# EAGLE board CAA-NMC-OSH_panelized (EAGLE 9.2.2)
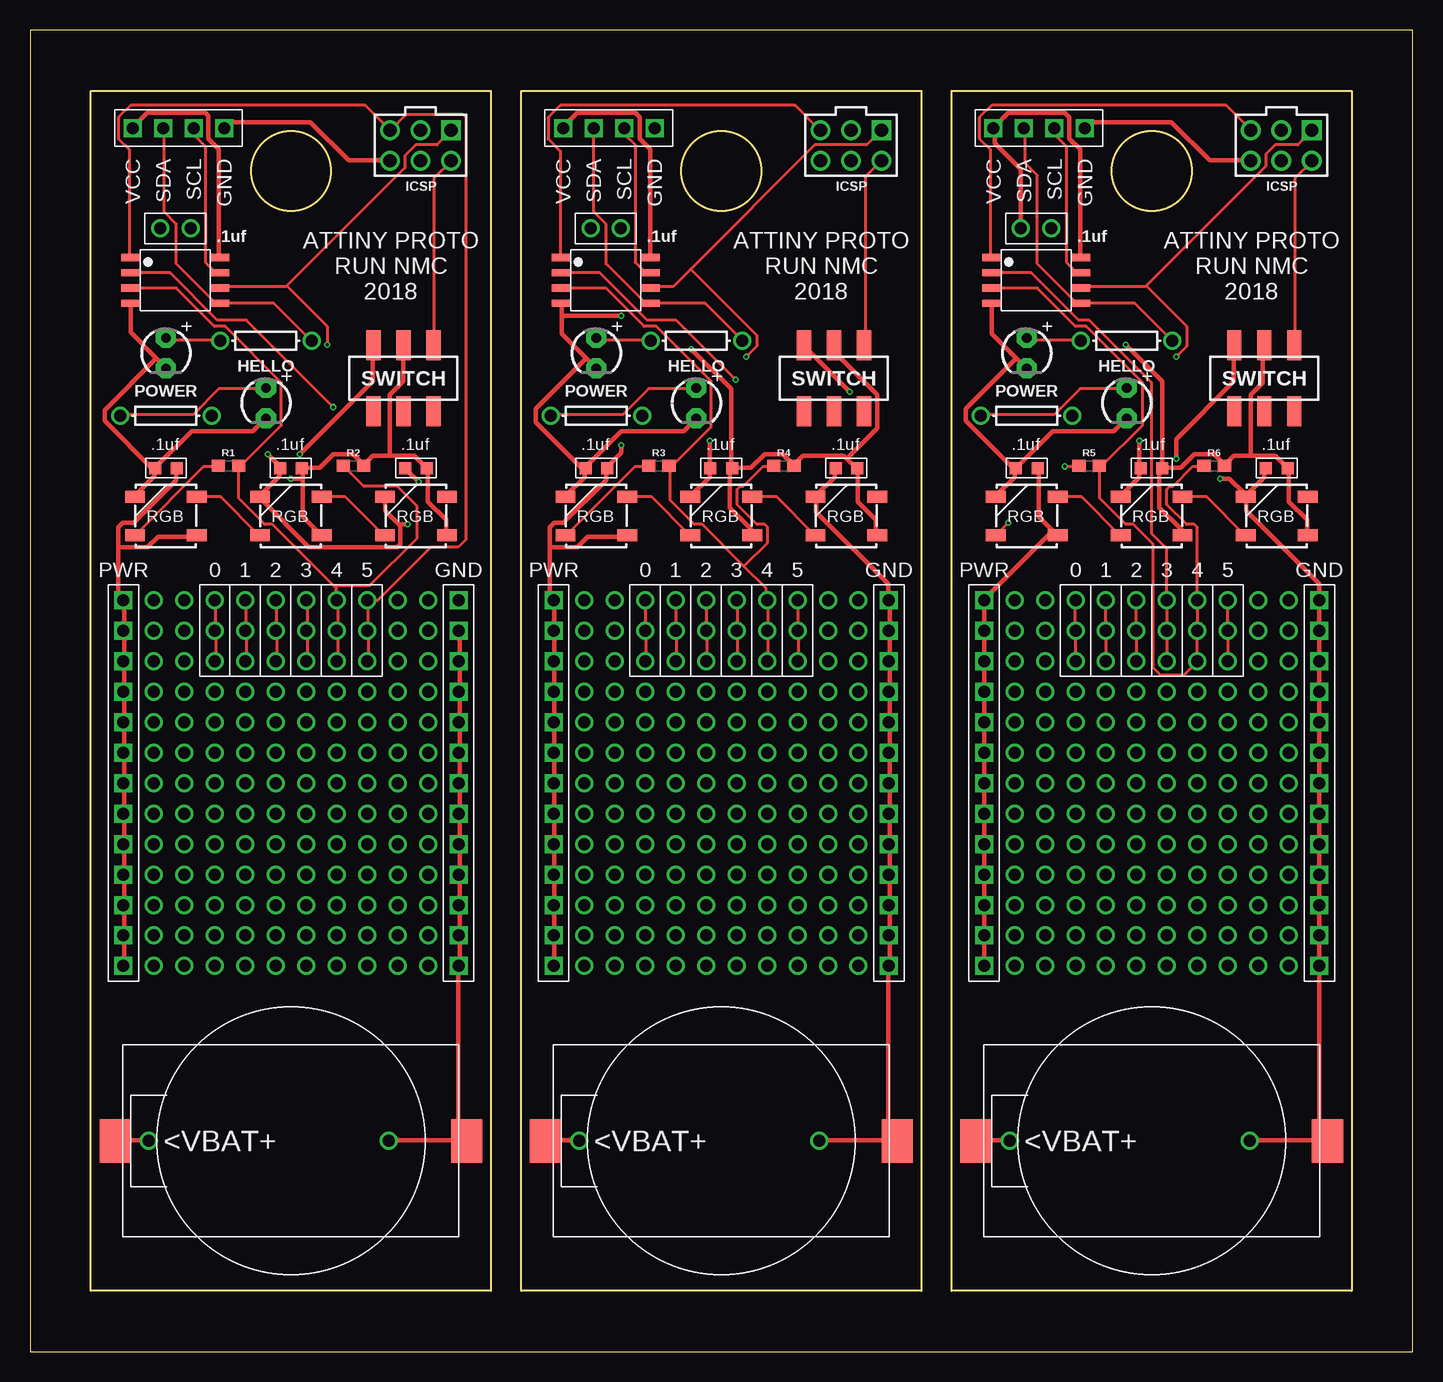
[diagram p0: board, top side]
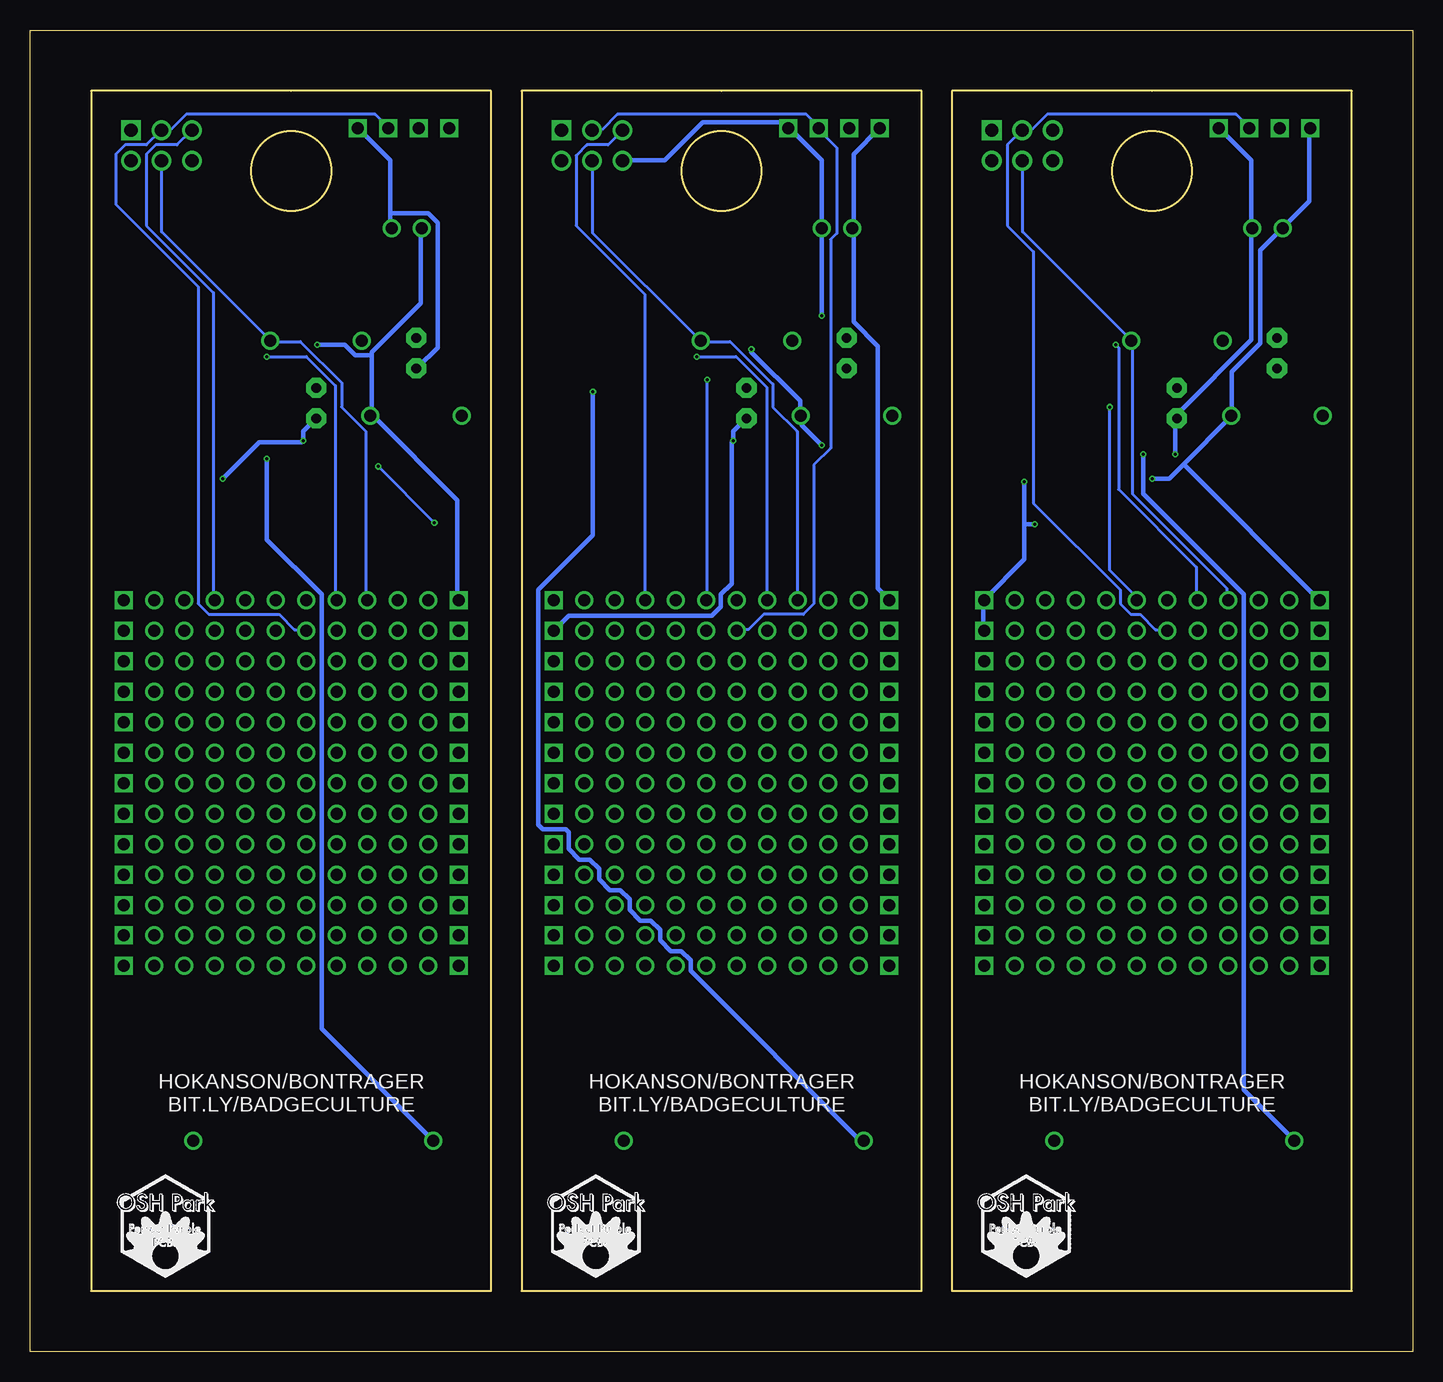
[diagram p1: board, bottom side, seen from below]

Size 115.24 x 110.16 mm. Coordinates in mm from the lower left corner, seen from the top.
Outline: 5.08,105.08 5.08,5.08 38.41,5.08 38.41,105.08 5.08,105.08
Outline: 5.08,105.08 21.75,105.08
Outline: 40.95,105.08 40.95,5.08 74.28,5.08 74.28,105.08 40.95,105.08
Outline: 40.95,105.08 57.61,105.08
Outline: 76.81,105.08 76.81,5.08 110.14,5.08 110.14,105.08 76.81,105.08
Outline: 76.81,105.08 93.48,105.08
Outline: 0,0 115.24,0 115.24,110.16 0,110.16 0,0
Outline: circle at 21.75,98.4 radius 3.33
Outline: circle at 57.61,98.4 radius 3.33
Outline: circle at 93.47,98.4 radius 3.33
Copper layers (1*16): Top 0.035559375mm / dielectric 1.6mm / Bottom 0.035559375mm
Design rules "oshpark-2layer": minimum track width 6mil, minimum drill 10mil, track to track 6mil, track to pad 6mil, pad to pad 6mil, via to via 6mil, smd to smd 6mil, copper to edge 15mil, drill to drill 6mil, minimum pad ring 5mil, minimum via ring 5mil, stop-mask expansion 2.5mil, vias tented up to drill 0mil, thermal gap 10mil
Net classes: 0 default: width 0.254 mm, clearance 0.254 mm; 1 VCC: width 0.381 mm, clearance 0.254 mm; 2 GND: width 0.381 mm, clearance 0.254 mm; 3 VBAT: width 0.381 mm, clearance 0.254 mm

## Footprints (pad centres in the part's own frame; a part is rotated, then mirrored left to right if it is on the bottom)
WS2812B = smd 1 x 1: CAP1 -0.9,4; CAP2 0.9,4 | smd 1.651 x 1: DI -2.577,-1.6; DO 2.577,1.6; GND -2.577,1.6; VCC 2.577,-1.6
LED3MM = drill 0.813 pad 1.676 octagon: NEG 1.27,0; POS -1.27,0
SOT127P798X216-8N = smd 1.5 x 0.6: GND -3.75,-1.905; PB0 3.75,-1.905; PB1 3.75,-0.635; PB2 3.75,0.635; PB3 -3.75,0.635; PB4 -3.75,-0.635; PB5 -3.75,1.905; VCC 3.75,1.905
HDRV6W64P254_2X3_762X508X868P = drill 1.1 pad 1.65: 0/MOSI/SDA 0,1.27; 2/SCK/SCL 0,3.81; 5/RST -2.54,3.81; GND -2.54,1.27; VCC 2.54,1.27 | drill 1.1 pad 1.65 square: 1/MISO 2.54,3.81
0603 = smd 1.1 x 1: 1 -0.85,0; 2 0.85,0
PROTO = drill 1: 0A -6.35,30.48; 0B -6.35,27.94; 0C -6.35,25.4; 1A -3.81,30.48; 1B -3.81,27.94; 1C -3.81,25.4; 2A -1.27,30.48; 2B -1.27,27.94; 2C -1.27,25.4; 3A 1.27,30.48; 3B 1.27,27.94; 3C 1.27,25.4; 4A 3.81,30.48; 4B 3.81,27.94; 4C 3.81,25.4; 5A 6.35,30.48; 5B 6.35,27.94; 5C 6.35,25.4; VSTRIP1 -8.89,22.86; VSTRIP2 -8.89,20.32; VSTRIP3 -8.89,17.78; VSTRIP4 -8.89,15.24; VSTRIP5 -8.89,12.7; VSTRIP6 -6.35,22.86; VSTRIP7 -6.35,20.32; VSTRIP8 -6.35,17.78; VSTRIP9 -6.35,15.24; VSTRIP10 -6.35,12.7; VSTRIP11 -11.43,10.16; VSTRIP12 -11.43,7.62; VSTRIP13 -11.43,5.08; VSTRIP14 -11.43,2.54; VSTRIP15 -11.43,0; VSTRIP16 -3.81,22.86; VSTRIP17 -3.81,20.32; VSTRIP18 -3.81,17.78; VSTRIP19 -3.81,15.24; VSTRIP20 -3.81,12.7; VSTRIP21 -1.27,22.86; VSTRIP22 -1.27,20.32; VSTRIP23 -1.27,17.78; VSTRIP24 -1.27,15.24; VSTRIP25 -1.27,12.7; VSTRIP26 1.27,22.86; VSTRIP27 1.27,20.32; VSTRIP28 1.27,17.78; VSTRIP29 1.27,15.24; VSTRIP30 1.27,12.7; VSTRIP31 3.81,22.86; VSTRIP32 3.81,20.32; VSTRIP33 3.81,17.78; VSTRIP34 3.81,15.24; VSTRIP35 3.81,12.7; VSTRIP36 6.35,22.86; VSTRIP37 6.35,20.32; VSTRIP38 6.35,17.78; VSTRIP39 6.35,15.24; VSTRIP40 6.35,12.7; VSTRIP41 8.89,22.86; VSTRIP42 8.89,20.32; VSTRIP43 8.89,17.78; VSTRIP44 8.89,15.24; VSTRIP45 8.89,12.7; VSTRIP46 11.43,22.86; VSTRIP47 11.43,20.32; VSTRIP48 11.43,17.78; VSTRIP49 11.43,15.24; VSTRIP50 11.43,12.7; VSTRIP51 -11.43,22.86; VSTRIP52 -11.43,20.32; VSTRIP53 -11.43,17.78; VSTRIP54 -11.43,15.24; VSTRIP55 -8.89,10.16; VSTRIP56 -8.89,7.62; VSTRIP57 -8.89,5.08; VSTRIP58 -8.89,2.54; VSTRIP59 -8.89,0; VSTRIP60 -11.43,12.7; VSTRIP61 -8.89,30.48; VSTRIP62 -8.89,27.94; VSTRIP63 -8.89,25.4; VSTRIP64 -11.43,30.48; VSTRIP65 -11.43,27.94; VSTRIP66 -11.43,25.4; VSTRIP67 8.89,30.48; VSTRIP68 8.89,27.94; VSTRIP69 8.89,25.4; VSTRIP70 11.43,30.48; VSTRIP71 11.43,27.94; VSTRIP72 11.43,25.4; VSTRIP75 -6.35,10.16; VSTRIP76 -6.35,7.62; VSTRIP77 -6.35,5.08; VSTRIP78 -6.35,2.54; VSTRIP79 -6.35,0; VSTRIP95 -3.81,10.16; VSTRIP96 -3.81,7.62; VSTRIP97 -3.81,5.08; VSTRIP98 -3.81,2.54; VSTRIP99 -3.81,0; VSTRIP115 -1.27,10.16; VSTRIP116 -1.27,7.62; VSTRIP117 -1.27,5.08; VSTRIP118 -1.27,2.54; VSTRIP119 -1.27,0; VSTRIP135 1.27,10.16; VSTRIP136 1.27,7.62; VSTRIP137 1.27,5.08; VSTRIP138 1.27,2.54; VSTRIP139 1.27,0; VSTRIP155 3.81,10.16; VSTRIP156 3.81,7.62; VSTRIP157 3.81,5.08; VSTRIP158 3.81,2.54; VSTRIP159 3.81,0; VSTRIP175 6.35,10.16; VSTRIP176 6.35,7.62; VSTRIP177 6.35,5.08; VSTRIP178 6.35,2.54; VSTRIP179 6.35,0; VSTRIP195 8.89,10.16; VSTRIP196 8.89,7.62; VSTRIP197 8.89,5.08; VSTRIP198 8.89,2.54; VSTRIP199 8.89,0; VSTRIP215 11.43,10.16; VSTRIP216 11.43,7.62; VSTRIP217 11.43,5.08; VSTRIP218 11.43,2.54; VSTRIP219 11.43,0 | drill 1 square: GND0 13.97,0; GND1 13.97,2.54; GND2 13.97,5.08; GND3 13.97,7.62; GND4 13.97,10.16; GND5 13.97,12.7; GND6 13.97,15.24; GND7 13.97,17.78; GND8 13.97,20.32; GND9 13.97,22.86; GND10 13.97,25.4; GND11 13.97,27.94; GND12 13.97,30.48; PWR0 -13.97,0; PWR1 -13.97,2.54; PWR2 -13.97,5.08; PWR3 -13.97,7.62; PWR4 -13.97,10.16; PWR5 -13.97,12.7; PWR6 -13.97,15.24; PWR7 -13.97,17.78; PWR8 -13.97,20.32; PWR9 -13.97,22.86; PWR10 -13.97,25.4; PWR11 -13.97,27.94; PWR12 -13.97,30.48
SMT-CR-HOLDER = smd 2.6 x 3.65: GND 14.65,0; VBAT -14.65,0
THRU-CR-HOLDER = drill 1: GND 8.15,0; VBAT -11.85,0
I2C-PADS = drill 1 square: GND 0,3.81; SCL 0,1.27; SDA 0,-1.27; VCC 0,-3.81
DECOUPLING_CAP = drill 1: P$1 0,0; P$2 2.54,0
AXIAL-0.3 = drill 1: P$3 -3.81,0; P$4 3.81,0
SMT-SWITCH = smd 1.2 x 2.5: 1 -2.5,-2.75; 2 0,-2.75; 3 2.5,-2.75; 4 -2.5,2.75; 5 0,2.75; 6 2.5,2.75

## Placement (x,y rotation side)
D1  WS2812B  [WS2812B]  11.33,69.65 0 top
D2  WS2812B  [WS2812B]  21.74,69.65 0 top
D3  WS2812B  [WS2812B]  32.17,69.65 0 top
D4  WS2812B  [WS2812B]  47.2,69.65 0 top
D5  WS2812B  [WS2812B]  57.61,69.65 0 top
D6  WS2812B  [WS2812B]  68.03,69.65 0 top
D7  WS2812B  [WS2812B]  83.06,69.65 0 top
D8  WS2812B  [WS2812B]  93.47,69.65 0 top
D9  WS2812B  [WS2812B]  103.9,69.65 0 top
HELLO  LED3MM  [LED3MM]  11.33,83.23 270 top
HELLO1  LED3MM  [LED3MM]  47.19,83.23 270 top
HELLO2  LED3MM  [LED3MM]  83.06,83.23 270 top
IC1  ATTINY85-20SU  [SOT127P798X216-8N]  12.11,89.3 0 top
IC2  ATTINY85-20SU  [SOT127P798X216-8N]  47.98,89.3 0 top
IC3  ATTINY85-20SU  [SOT127P798X216-8N]  83.84,89.3 0 top
J1  M20-9980346  [HDRV6W64P254_2X3_762X508X868P]  32.55,98.01 0 top
J2  M20-9980346  [HDRV6W64P254_2X3_762X508X868P]  68.41,98.01 0 top
J3  M20-9980346  [HDRV6W64P254_2X3_762X508X868P]  104.28,98.01 0 top
POWER  LED3MM  [LED3MM]  19.66,79.06 270 top
POWER1  LED3MM  [LED3MM]  55.53,79.06 270 top
POWER2  LED3MM  [LED3MM]  91.39,79.06 270 top
R1  470  [0603]  16.54,73.85 0 top
R2  10k  [0603]  26.96,73.85 0 top
R3  470  [0603]  52.4,73.85 0 top
R4  10k  [0603]  62.82,73.85 0 top
R5  470  [0603]  88.27,73.85 0 top
R6  10k  [0603]  98.69,73.85 0 top
U$1  PROTO  [PROTO]  21.75,32.16 0 top
U$2  SMT-BATTERY-HOLDER  [SMT-CR-HOLDER]  21.75,17.58 0 top
U$3  THRU-CR-HOLDER  [THRU-CR-HOLDER]  21.75,17.58 0 top
U$4  I2C-PADS  [I2C-PADS]  12.37,101.99 270 top
U$5  [OSHPARK_LOGOHEX]  36.33,6.12 0 bottom
U$6  DECOUPLING_CAP  [DECOUPLING_CAP]  49.25,93.64 180 top
U$7  RESISTOR  [AXIAL-0.3]  47.19,78.02 0 top
U$8  RESISTOR  [AXIAL-0.3]  55.53,84.27 0 top
U$9  SMT-SWITCH  [SMT-SWITCH]  66.99,81.15 0 top
U$10  PROTO  [PROTO]  57.61,32.16 0 top
U$11  SMT-BATTERY-HOLDER  [SMT-CR-HOLDER]  57.61,17.58 0 top
U$12  THRU-CR-HOLDER  [THRU-CR-HOLDER]  57.61,17.58 0 top
U$13  I2C-PADS  [I2C-PADS]  48.23,101.99 270 top
U$14  [OSHPARK_LOGOHEX]  72.2,6.12 0 bottom
U$15  DECOUPLING_CAP  [DECOUPLING_CAP]  85.11,93.64 180 top
U$16  RESISTOR  [AXIAL-0.3]  83.06,78.02 0 top
U$17  RESISTOR  [AXIAL-0.3]  91.39,84.27 0 top
U$18  SMT-SWITCH  [SMT-SWITCH]  102.85,81.15 0 top
U$19  PROTO  [PROTO]  93.48,32.16 0 top
U$20  SMT-BATTERY-HOLDER  [SMT-CR-HOLDER]  93.48,17.58 0 top
U$21  THRU-CR-HOLDER  [THRU-CR-HOLDER]  93.48,17.58 0 top
U$22  I2C-PADS  [I2C-PADS]  84.1,101.99 270 top
U$23  [OSHPARK_LOGOHEX]  108.06,6.12 0 bottom
U$123  DECOUPLING_CAP  [DECOUPLING_CAP]  13.38,93.64 180 top
U$126  RESISTOR  [AXIAL-0.3]  11.33,78.02 0 top
U$127  RESISTOR  [AXIAL-0.3]  19.66,84.27 0 top
U$145  SMT-SWITCH  [SMT-SWITCH]  31.12,81.15 0 top

## Library data of the parts
D1-D9 = BadgeParts; PROD_ID: DIO-12503
HELLO HELLO1 HELLO2 POWER POWER1 POWER2 U$1-U$4 U$6-U$13 U$15-U$22 U$123 U$126 U$127 U$145 = BadgeParts
IC1-IC3 = BadgeParts; ARROW_PART_NUMBER: ATTINY85-20SU; ARROW_PRICE/STOCK: https://www.arrow.com/en/products/attiny85-20su/microchip-technology; DESCRIPTION: MICROCHIP - ATTINY85-20SU - MICROCONTROLLER MCU, 8 BIT, ATTINY, 20MHZ, SOIC-8; HEIGHT: 2.16mm; MANUFACTURER_NAME: Microchip; MANUFACTURER_PART_NUMBER: ATTINY85-20SU; RS_PART_NUMBER: 1331674; RS_PRICE/STOCK: http://uk.rs-online.com/web/p/products/1331674
J1-J3 = BadgeParts; ARROW_PART_NUMBER: M20-9980346; ARROW_PRICE/STOCK: http://uk.rs-online.com/web/p/products/7457046P; DESCRIPTION: 03+03 DIL Vertical Pin Header HARWIN M20 Series, 2.54mm Pitch 6 Way 2 Row Straight PCB Header, Solder Termination, 3A; HEIGHT: 8.68mm; MANUFACTURER_NAME: HARWIN; MANUFACTURER_PART_NUMBER: M20-9980346; RS_PART_NUMBER: 7457046P; RS_PRICE/STOCK: http://uk.rs-online.com/web/p/products/7457046P
R1 R3 R5 = SparkFun-Resistors; PROD_ID: RES-07869
R2 R4 R6 = SparkFun-Resistors; PROD_ID: RES-00824
U$5 U$14 U$23 = NickParts

## Nets
GND [GND]: D1.CAP1 D1.GND D2.CAP1 D2.GND D3.CAP1 D3.GND HELLO.NEG IC1.GND J1.GND POWER.NEG U$1.GND0 U$1.GND1 U$1.GND2 U$1.GND3 U$1.GND4 U$1.GND5 U$1.GND6 U$1.GND7 U$1.GND8 U$1.GND9 U$1.GND10 U$1.GND11 U$1.GND12 U$2.GND U$3.GND U$4.GND U$123.P$1
GND1 [GND]: D4.CAP1 D4.GND D5.CAP1 D5.GND D6.CAP1 D6.GND HELLO1.NEG IC2.GND J2.GND POWER1.NEG U$6.P$1 U$10.GND0 U$10.GND1 U$10.GND2 U$10.GND3 U$10.GND4 U$10.GND5 U$10.GND6 U$10.GND7 U$10.GND8 U$10.GND9 U$10.GND10 U$10.GND11 U$10.GND12 U$11.GND U$12.GND U$13.GND
GND2 [GND]: D7.CAP1 D7.GND D8.CAP1 D8.GND D9.CAP1 D9.GND HELLO2.NEG IC3.GND J3.GND POWER2.NEG U$15.P$1 U$19.GND0 U$19.GND1 U$19.GND2 U$19.GND3 U$19.GND4 U$19.GND5 U$19.GND6 U$19.GND7 U$19.GND8 U$19.GND9 U$19.GND10 U$19.GND11 U$19.GND12 U$20.GND U$21.GND U$22.GND
N$1: POWER.POS U$126.P$3
N$2: HELLO.POS U$127.P$3
N$3: D1.DO D2.DI
N$4: D2.DO D3.DI
N$5: D1.DI R1.1
N$6: POWER1.POS U$7.P$3
N$7: HELLO1.POS U$8.P$3
N$8: D4.DO D5.DI
N$9: D5.DO D6.DI
N$10: D4.DI R3.1
N$11: POWER2.POS U$16.P$3
N$12: HELLO2.POS U$17.P$3
N$13: D7.DO D8.DI
N$14: D8.DO D9.DI
N$15: D7.DI R5.1
PB0: IC1.PB0 J1.0/MOSI/SDA U$1.0A U$1.0B U$1.0C U$4.SDA U$127.P$4
PB1: IC1.PB1 J1.1/MISO U$1.1A U$1.1B U$1.1C
PB2: IC1.PB2 J1.2/SCK/SCL U$1.2A U$1.2B U$1.2C U$4.SCL
PB3: IC1.PB3 U$1.3A U$1.3B U$1.3C
PB4: IC1.PB4 R1.2 R2.1 U$1.4A U$1.4B U$1.4C
PB5: IC1.PB5 J1.5/RST U$1.5A U$1.5B U$1.5C
PB6: IC2.PB0 J2.0/MOSI/SDA U$8.P$4 U$10.0A U$10.0B U$10.0C U$13.SDA
PB7: IC2.PB3 U$10.3A U$10.3B U$10.3C
PB8: IC2.PB4 R3.2 R4.1 U$10.4A U$10.4B U$10.4C
PB9: IC2.PB2 J2.2/SCK/SCL U$10.2A U$10.2B U$10.2C U$13.SCL
PB10: IC2.PB5 J2.5/RST U$10.5A U$10.5B U$10.5C
PB11: IC2.PB1 J2.1/MISO U$10.1A U$10.1B U$10.1C
PB12: IC3.PB0 J3.0/MOSI/SDA U$17.P$4 U$19.0A U$19.0B U$19.0C U$22.SDA
PB13: IC3.PB3 U$19.3A U$19.3B U$19.3C
PB14: IC3.PB4 R5.2 R6.1 U$19.4A U$19.4B U$19.4C
PB15: IC3.PB2 J3.2/SCK/SCL U$19.2A U$19.2B U$19.2C U$22.SCL
PB16: IC3.PB5 J3.5/RST U$19.5A U$19.5B U$19.5C
PB17: IC3.PB1 J3.1/MISO U$19.1A U$19.1B U$19.1C
VBAT [VBAT]: U$2.VBAT U$3.VBAT U$145.4
VBAT1 [VBAT]: U$9.4 U$11.VBAT U$12.VBAT
VBAT2 [VBAT]: U$18.4 U$20.VBAT U$21.VBAT
VCC [VCC]: D1.CAP2 D1.VCC D2.CAP2 D2.VCC D3.CAP2 D3.VCC IC1.VCC R2.2 U$1.PWR0 U$1.PWR1 U$1.PWR2 U$1.PWR3 U$1.PWR4 U$1.PWR5 U$1.PWR6 U$1.PWR7 U$1.PWR8 U$1.PWR9 U$1.PWR10 U$1.PWR11 U$1.PWR12 U$4.VCC U$123.P$2 U$126.P$4 U$145.5
VCC1 [VCC]: D4.CAP2 D4.VCC D5.CAP2 D5.VCC D6.CAP2 D6.VCC IC2.VCC R4.2 U$6.P$2 U$7.P$4 U$9.5 U$10.PWR0 U$10.PWR1 U$10.PWR2 U$10.PWR3 U$10.PWR4 U$10.PWR5 U$10.PWR6 U$10.PWR7 U$10.PWR8 U$10.PWR9 U$10.PWR10 U$10.PWR11 U$10.PWR12 U$13.VCC
VCC2 [VCC]: D7.CAP2 D7.VCC D8.CAP2 D8.VCC D9.CAP2 D9.VCC IC3.VCC R6.2 U$15.P$2 U$16.P$4 U$18.5 U$19.PWR0 U$19.PWR1 U$19.PWR2 U$19.PWR3 U$19.PWR4 U$19.PWR5 U$19.PWR6 U$19.PWR7 U$19.PWR8 U$19.PWR9 U$19.PWR10 U$19.PWR11 U$19.PWR12 U$22.VCC
VUSB: J1.VCC U$145.6
VUSB1: J2.VCC U$9.6
VUSB2: J3.VCC U$18.6

## Tracks (layer width: path | path; a pad name or v marks a point on that pad's centre or on a via)
GND  (via drill 0.25)
  Top 0.381: J1.GND 29.97,99.31 26.54,99.31 23.37,102.49 16.64,102.49 16.26,102.11 U$4.GND | 10.54,82.8 11.3,82.04 HELLO.NEG | 10.54,82.8 8.38,84.96 8.38,87.38 IC1.GND | D1.CAP1 10.41,73.53 10.41,73.03 8.76,71.37 D1.GND | D1.CAP1 10.54,73.79 13.46,76.71 18.54,76.71 19.56,77.72 POWER.NEG | 10.54,82.8 6.22,78.49 6.22,77.6 10.29,73.53 D1.CAP1 | 30.86,68.83 29.59,70.1 D3.GND | 30.86,68.83 30.86,67.31 30.61,67.06 23.24,67.06 19.18,71.12 D2.GND 19.18,71.37 20.83,73.03 20.83,73.53 D2.CAP1 20.83,73.79 v19.81,74.8 | U$1.GND11 35.81,60.07 35.81,57.66 U$1.GND10 35.81,57.4 35.81,55.12 U$1.GND9 35.81,54.99 35.81,52.58 U$1.GND8 35.81,52.32 35.81,50.04 U$1.GND7 35.81,49.91 35.81,47.5 U$1.GND6 35.81,47.24 35.81,44.96 U$1.GND5 35.81,44.83 35.81,42.42 U$1.GND4 35.81,42.16 35.81,39.88 U$1.GND3 35.81,39.75 35.81,37.34 U$1.GND2 35.81,37.08 35.81,34.8 U$1.GND1 35.81,34.67 35.81,32.26 U$1.GND0 35.69,32 35.69,17.78 U$2.GND 36.32,17.65 29.97,17.65 U$3.GND | v32.38,72.52 31.37,73.53 D3.CAP1 | v31.5,68.96 30.99,68.96 30.86,68.83
  Bottom 0.381: U$4.GND 16.13,101.98 13.46,99.31 13.46,93.73 U$123.P$1 13.46,93.47 13.46,84.33 19.56,78.23 19.56,77.85 POWER.NEG 19.81,77.72 v19.81,74.8 | 32.38,68.96 32.38,66.04 35.69,62.74 U$1.GND12 35.81,62.48 35.81,60.2 U$1.GND11 | 32.38,68.96 v32.38,72.52 | 32.38,68.96 v31.5,68.96
GND1  (via drill 0.25)
  Top 0.381: 44.32,86.36 44.32,84.84 46.35,82.8 | 44.32,86.36 44.32,87.38 IC2.GND | 46.35,82.8 47.12,82.04 HELLO1.NEG | D5.GND 55.12,71.37 56.64,72.9 56.64,73.53 D5.CAP1 56.64,73.79 v56.64,75.95 | D4.CAP1 46.23,73.53 46.23,72.9 44.7,71.37 D4.GND | D4.CAP1 46.35,73.79 49.28,76.71 54.48,76.71 55.5,77.72 POWER1.NEG | 46.35,82.8 42.16,78.61 42.16,77.47 46.1,73.53 D4.CAP1 | 44.32,86.36 v49.28,86.36 | D6.CAP1 67.06,73.53 67.06,72.9 65.53,71.37 D6.GND 65.53,71.12 65.53,69.98 71.5,64.01 71.5,62.74 U$10.GND12 71.63,62.48 71.63,60.2 U$10.GND11 71.63,60.07 71.63,57.66 U$10.GND10 71.63,57.4 71.63,55.12 U$10.GND9 71.63,54.99 71.63,52.58 U$10.GND8 71.63,52.32 71.63,50.04 U$10.GND7 71.63,49.91 71.63,47.5 U$10.GND6 71.63,47.24 71.63,44.96 U$10.GND5 71.63,44.83 71.63,42.42 U$10.GND4 71.63,42.16 71.63,39.88 U$10.GND3 71.63,39.75 71.63,37.34 U$10.GND2 71.63,37.08 71.63,34.8 U$10.GND1 71.63,34.67 71.63,32.26 U$10.GND0 71.5,32 71.5,17.78 U$11.GND 72.14,17.65 65.79,17.65 U$12.GND
  Bottom 0.381: J2.GND 65.79,99.31 62.36,99.31 59.18,102.49 52.7,102.49 52.2,101.98 U$13.GND 51.94,101.98 49.28,99.31 49.28,93.73 U$6.P$1 49.28,93.47 v49.28,86.36 | POWER1.NEG 55.63,77.72 56.64,76.71 v56.64,75.95 56.77,75.82 56.77,64.01 57.66,63.12 57.66,62.1 58.42,61.34 70.36,61.34 71.5,60.2 U$10.GND11
GND2  (via drill 0.25)
  Top 0.381: J3.GND 101.73,99.31 98.3,99.31 95.12,102.49 88.39,102.49 88.01,102.11 U$22.GND | 82.17,82.8 82.93,82.04 HELLO2.NEG | 82.17,82.8 80.14,84.84 80.14,87.38 IC3.GND | D8.GND 90.93,71.37 92.46,72.9 92.46,73.53 D8.CAP1 92.46,73.79 v92.46,75.95 | D7.CAP1 82.04,73.53 82.04,72.9 80.52,71.37 D7.GND | D7.CAP1 82.3,73.79 85.22,76.71 90.3,76.71 91.31,77.72 POWER2.NEG | 82.17,82.8 77.98,78.61 77.98,77.6 81.92,73.66 D7.CAP1 | D9.CAP1 102.87,73.53 102.87,72.9 101.35,71.37 D9.GND | D9.GND 101.35,71.12 101.35,70.1 107.44,64.01 107.44,62.74 U$19.GND12 107.44,62.48 107.44,60.2 U$19.GND11 107.44,60.07 107.44,57.66 U$19.GND10 107.44,57.4 107.44,55.12 U$19.GND9 107.44,54.99 107.44,52.58 U$19.GND8 107.44,52.32 107.44,50.04 U$19.GND7 107.44,49.91 107.44,47.5 U$19.GND6 107.44,47.24 107.44,44.96 U$19.GND5 107.44,44.83 107.44,42.42 U$19.GND4 107.44,42.16 107.44,39.88 U$19.GND3 107.44,39.75 107.44,37.34 U$19.GND2 107.44,37.08 107.44,34.8 U$19.GND1 107.44,34.67 107.44,32.26 U$19.GND0 107.44,32 107.44,17.78 U$20.GND 108.08,17.65 101.73,17.65 U$21.GND | v99.19,72.77 99.95,72.77 101.22,71.5 D9.GND
  Bottom 0.381: 85.22,94.87 85.22,99.31 87.88,101.98 U$22.GND | 85.22,94.87 85.22,93.73 U$15.P$1 | POWER2.NEG 91.44,77.72 92.46,76.71 v92.46,75.95 92.58,75.82 96.14,75.82 v99.19,72.77 | 85.22,94.87 82.04,94.87 81.28,94.11 81.28,83.69 82.93,82.04 HELLO2.NEG
N$1
  Top 0.254: U$126.P$3 7.62,78.11 13.59,78.11 15.75,80.26 19.56,80.26 POWER.POS
N$2
  Top 0.254: U$127.P$3 15.75,84.33 11.56,84.33 11.43,84.45 HELLO.POS
N$3
  Top 0.254: D1.DO 13.97,71.25 15.88,71.25 19.05,68.07 D2.DI
N$4
  Top 0.254: D2.DO 24.38,71.25 26.29,71.25 29.46,68.07 D3.DI
N$5
  Top 0.254: R1.1 15.62,73.79 14.48,73.79 8.76,68.07 D1.DI
N$6
  Top 0.254: U$7.P$3 43.43,78.11 49.4,78.11 51.56,80.26 55.5,80.26 POWER1.POS
N$7
  Top 0.254: U$8.P$3 51.69,84.33 47.37,84.33 47.24,84.45 HELLO1.POS
N$8
  Top 0.254: D4.DO 49.78,71.25 51.82,71.25 54.99,68.07 D5.DI
N$9
  Top 0.254: D5.DO 60.2,71.25 62.23,71.25 65.41,68.07 D6.DI
N$10
  Top 0.254: R3.1 51.44,73.79 50.42,73.79 44.7,68.07 D4.DI
N$11
  Top 0.254: U$16.P$3 79.25,78.11 85.34,78.11 87.5,80.26 91.31,80.26 POWER2.POS
N$12
  Top 0.254: U$17.P$3 87.5,84.33 83.19,84.33 83.06,84.45 HELLO2.POS
N$13
  Top 0.254: D7.DO 85.72,71.25 87.63,71.25 90.81,68.07 D8.DI
N$14
  Top 0.254: D8.DO 96.14,71.25 98.04,71.25 101.22,68.07 D9.DI
N$15  (via drill 0.25)
  Top 0.254: v86.23,73.79 87.38,73.79 R5.1 | v81.53,69.09 80.52,68.07 D7.DI
  Bottom 0.254: v81.53,69.09 v86.23,73.79
PB0
  Top 0.254: U$1.0C 15.49,57.66 15.49,60.07 U$1.0B 15.49,60.2 15.49,62.61 U$1.0A | U$127.P$4 23.37,84.33 20.32,87.38 15.88,87.38 IC1.PB0 15.75,87.5 15.37,87.5 12.19,90.68 12.19,93.98 11.18,95 11.18,101.98 U$4.SDA
  Bottom 0.254: J1.0/MOSI/SDA 32.51,99.19 32.51,93.34 23.5,84.33 U$127.P$4 23.37,84.2 23.37,71.5 15.49,63.63 15.49,62.74 U$1.0A
PB1  (via drill 0.25)
  Top 0.254: U$1.1C 18.03,57.66 18.03,60.07 U$1.1B 18.03,60.2 18.03,62.61 U$1.1A | 21.4,88.84 31.24,98.68 31.24,99.69 32.13,100.58 33.91,100.58 35.05,101.73 J1.1/MISO | 21.4,88.84 21.34,88.77 15.88,88.77 IC1.PB1 | v24.77,83.95 24.77,85.47 21.4,88.84
  Bottom 0.254: v24.77,83.95 24.51,83.69 24.51,71.88 18.03,65.41 18.03,62.74 U$1.1A
PB2
  Top 0.254: U$1.2C 20.57,57.66 20.57,60.07 U$1.2B 20.57,60.2 20.57,62.61 U$1.2A | IC1.PB2 15.75,90.04 15.37,90.04 14.61,90.81 14.61,100.46 13.72,101.35 13.72,101.98 U$4.SCL
  Bottom 0.254: U$4.SCL 13.72,102.11 14.73,103.12 30.48,103.12 31.75,101.85 32.51,101.85 J1.2/SCK/SCL 32.64,101.73 33.78,100.58 33.78,93.85 31.62,91.69 31.62,70.74 24.38,63.5 24.38,62.36 23.5,61.47 22.73,61.47 21.46,60.2 20.57,60.2 U$1.2B
PB3  (via drill 0.25)
  Top 0.254: U$1.3C 23.11,57.66 23.11,60.07 U$1.3B 23.11,60.2 23.11,62.61 U$1.3A | v25.27,78.74 18.03,85.98 15.62,85.98 11.68,89.92 8.38,89.92 IC1.PB3
  Bottom 0.254: v25.27,78.74 25.27,65.15 23.11,62.99 23.11,62.74 U$1.3A
PB4
  Top 0.254: U$1.4C 25.65,57.66 25.65,60.07 U$1.4B 25.65,60.2 25.65,62.61 U$1.4A 25.53,62.74 25.53,63.63 25.34,63.82 | 25.34,63.82 20.19,68.96 19.56,68.96 17.4,71.12 17.4,73.79 R1.2 17.53,73.79 20.95,77.22 20.95,80.77 16.26,85.47 15.37,85.47 12.19,88.65 8.38,88.65 IC1.PB4 | R2.1 26.16,73.79 27.81,72.14 30.61,72.14 32.26,70.48 32.26,67.82 28.32,63.88 25.4,63.88 25.34,63.82
PB5
  Top 0.254: U$1.5C 28.19,57.66 28.19,60.07 U$1.5B 28.19,60.2 28.19,62.61 U$1.5A 28.32,62.61 28.96,62.61 33.4,67.06 35.69,67.06 36.32,67.69 36.32,102.87 36.07,103.12 31.37,103.12 30.1,101.85 J1.5/RST 29.97,101.85 27.94,103.89 8.38,103.89 7.37,102.87 7.37,101.09 8.26,100.2 8.26,91.31 IC1.PB5
PB6
  Top 0.254: U$10.0C 51.31,57.66 51.31,60.07 U$10.0B 51.31,60.2 51.31,62.61 U$10.0A | U$8.P$4 59.31,84.33 56.26,87.38 51.82,87.38 IC2.PB0 51.69,87.5 51.18,87.5 48.01,90.68 48.01,93.98 46.99,95 46.99,101.98 U$13.SDA
  Bottom 0.254: J2.0/MOSI/SDA 68.33,99.19 68.33,93.22 59.44,84.33 U$8.P$4 59.31,84.2 56.9,84.2 53.34,80.64 53.34,78.74 51.31,76.71 51.31,62.74 U$10.0A
PB7  (via drill 0.25)
  Top 0.254: U$10.3C 58.93,57.66 58.93,60.07 U$10.3B 58.93,60.2 58.93,62.61 U$10.3A | v58.8,81.03 53.85,85.98 51.44,85.98 47.5,89.92 44.32,89.92 IC2.PB3
  Bottom 0.254: v58.8,81.03 58.8,62.74 U$10.3A
PB8
  Top 0.254: U$10.4C 61.47,57.66 61.47,60.07 U$10.4B 61.47,60.2 61.47,62.61 U$10.4A 61.34,62.74 61.34,63.63 59.5,65.47 | 59.5,65.47 56.01,68.96 55.37,68.96 53.34,70.99 53.34,73.79 R3.2 53.47,73.79 56.77,77.09 56.77,80.9 52.2,85.47 51.18,85.47 48.01,88.65 44.32,88.65 IC2.PB4 | 59.5,65.47 61.47,67.44 61.47,68.71 61.21,68.96 60.58,68.96 58.93,70.61 58.93,71.88 59.18,72.14 59.44,72.14 61.09,73.79 61.85,73.79 R4.1
PB9
  Top 0.254: U$10.2C 56.39,57.66 56.39,60.07 U$10.2B 56.39,60.2 56.39,62.61 U$10.2A | IC2.PB2 51.69,90.04 51.18,90.04 50.42,90.81 50.42,100.58 49.53,101.47 49.53,101.98 U$13.SCL
  Bottom 0.254: J2.2/SCK/SCL 68.33,101.85 67.56,101.85 66.29,103.12 50.55,103.12 49.53,102.11 U$13.SCL 49.53,101.85 48.01,100.33 48.01,93.22 48.51,92.71 48.51,75.31 49.91,73.91 49.91,62.36 50.8,61.47 54.1,61.47 55.37,60.2 56.26,60.2 U$10.2B
PB10
  Top 0.254: U$10.5C 64.01,57.66 64.01,60.07 U$10.5B 64.01,60.2 64.01,62.61 U$10.5A | IC2.PB5 44.2,91.31 44.2,100.08 43.18,101.09 43.18,102.87 44.2,103.89 63.75,103.89 65.79,101.85 J2.5/RST
  Bottom 0.254: U$10.5A 64.01,62.74 64.01,88.14 69.72,93.85 69.72,99.69 68.83,100.58 67.06,100.58 65.91,101.73 J2.5/RST
PB11  (via drill 0.25)
  Top 0.254: U$10.1C 53.85,57.66 53.85,60.07 U$10.1B 53.85,60.2 53.85,62.61 U$10.1A | 55.05,90.23 65.41,100.58 69.72,100.58 70.87,101.73 J2.1/MISO | 55.05,90.23 53.59,88.77 51.82,88.77 IC2.PB1 | v59.69,82.93 60.58,83.82 60.58,84.71 55.05,90.23
  Bottom 0.254: v59.69,82.93 56.39,82.93 53.85,80.39 53.85,62.74 U$10.1A
PB12
  Top 0.254: U$19.0C 87.12,57.66 87.12,60.07 U$19.0B 87.12,60.2 87.12,62.61 U$19.0A | U$17.P$4 95.12,84.33 92.08,87.38 87.63,87.38 IC3.PB0 87.5,87.5 87.12,87.5 83.95,90.68 83.95,98.04 82.93,99.06 82.93,101.98 U$22.SDA
  Bottom 0.254: J3.0/MOSI/SDA 104.27,99.19 104.27,93.34 95.25,84.33 U$17.P$4 95.12,84.2 92.71,84.2 89.28,80.77 89.28,78.74 87.25,76.71 87.25,62.74 U$19.0A
PB13
  Top 0.254: U$19.3C 94.74,57.66 94.74,60.07 U$19.3B 94.74,60.2 94.74,62.61 U$19.3A 94.74,62.74 94.74,66.93 93.47,68.2 93.47,80.77 88.27,85.98 87.38,85.98 83.44,89.92 80.14,89.92 IC3.PB3
PB14
  Top 0.254: R6.1 97.79,73.79 96.9,73.79 95.25,72.14 95,72.14 94.74,71.88 94.74,70.61 96.39,68.96 97.03,68.96 97.28,68.71 97.28,62.74 U$19.4A 97.28,62.61 97.28,60.2 U$19.4B 97.28,60.07 97.28,57.66 U$19.4C 97.28,57.53 96.14,56.39 94.23,56.39 93.6,57.02 93.6,67.31 91.95,68.96 91.31,68.96 89.15,71.12 89.15,73.79 R5.2 89.28,73.79 92.71,77.22 92.71,80.77 88.01,85.47 87.12,85.47 83.95,88.65 80.14,88.65 IC3.PB4
PB15
  Top 0.254: U$19.2C 92.2,57.66 92.2,60.07 U$19.2B 92.2,60.2 92.2,62.61 U$19.2A | IC3.PB2 87.5,90.04 87.12,90.04 86.36,90.81 86.36,100.46 85.47,101.35 85.47,101.98 U$22.SCL
  Bottom 0.254: U$22.SCL 85.47,102.11 86.49,103.12 102.23,103.12 103.5,101.85 104.27,101.85 J3.2/SCK/SCL 104.39,101.73 105.54,100.58 107.31,100.58 108.08,99.82 108.08,95.63 101.22,88.77 101.22,62.36 100.33,61.47 94.49,61.47 93.22,60.2 92.33,60.2 U$19.2B
PB16
  Top 0.254: U$19.5C 99.82,57.66 99.82,60.07 U$19.5B 99.82,60.2 99.82,62.61 U$19.5A | IC3.PB5 80.01,91.31 80.01,100.2 79.12,101.09 79.12,102.87 80.14,103.89 99.69,103.89 101.73,101.85 J3.5/RST
  Bottom 0.254: U$19.5A 99.95,62.74 99.95,88.27 105.54,93.85 105.54,99.82 104.78,100.58 103,100.58 101.85,101.73 J3.5/RST
PB17  (via drill 0.25)
  Top 0.254: U$19.1C 89.66,57.66 89.66,60.07 U$19.1B 89.66,60.2 89.66,62.61 U$19.1A | 93.03,88.84 103,98.81 103,99.82 103.76,100.58 105.66,100.58 106.81,101.73 J3.1/MISO | 93.03,88.84 92.96,88.77 87.63,88.77 IC3.PB1 | v95.5,82.93 96.39,83.82 96.39,85.47 93.03,88.84
  Bottom 0.254: v95.5,82.93 92.2,82.93 89.79,80.52 89.79,62.74 U$19.1A
VBAT  (via drill 0.25)
  Top 0.381: v22.48,74.8 28.57,80.9 28.57,83.82 U$145.4 | U$2.VBAT 7.11,17.65 9.78,17.65 U$3.VBAT
  Bottom 0.381: v22.48,74.8 22.48,71.5 14.1,63.12 14.1,21.84 9.91,17.65 U$3.VBAT
VBAT1  (via drill 0.25)
  Top 0.381: v68.33,80.01 64.52,83.82 U$9.4 | U$11.VBAT 43.05,17.65 45.72,17.65 U$12.VBAT
  Bottom 0.381: v68.33,80.01 68.33,68.07 72.9,63.5 72.9,43.94 72.52,43.56 70.61,43.56 70.36,43.31 70.36,41.91 69.47,41.02 68.58,41.02 67.82,40.26 67.82,39.37 66.93,38.48 66.04,38.48 65.28,37.72 65.28,36.83 64.39,35.94 63.5,35.94 62.74,35.18 62.74,34.29 61.85,33.4 60.96,33.4 60.2,32.64 60.2,31.75 46.1,17.65 45.85,17.65 U$12.VBAT
VBAT2  (via drill 0.25)
  Top 0.381: v95.5,74.42 95.5,76.07 100.33,80.9 100.33,83.82 U$18.4 | U$20.VBAT 78.87,17.65 81.53,17.65 U$21.VBAT
  Bottom 0.381: v95.5,74.42 95.5,67.69 90.93,63.12 90.93,26.92 81.66,17.65 U$21.VBAT
VCC  (via drill 0.25)
  Top 0.381: U$1.PWR0 7.87,32.26 7.87,34.67 U$1.PWR1 7.87,34.8 7.87,37.08 U$1.PWR2 7.87,37.34 7.87,39.75 U$1.PWR3 7.87,39.88 7.87,42.16 U$1.PWR4 7.87,42.42 7.87,44.83 U$1.PWR5 7.87,44.96 7.87,47.24 U$1.PWR6 7.87,47.5 7.87,49.91 U$1.PWR7 7.87,50.04 7.87,52.32 U$1.PWR8 7.87,52.58 7.87,54.99 U$1.PWR9 7.87,55.12 7.87,57.4 U$1.PWR10 7.87,57.66 7.87,60.07 U$1.PWR11 7.87,60.2 7.87,62.48 U$1.PWR12 7.75,62.74 7.37,63.12 7.37,67.06 | 7.37,67.06 7.37,68.71 7.75,69.09 8.64,69.09 12.19,72.64 12.19,73.53 D1.CAP2 | 7.37,67.06 9.78,67.06 10.67,67.94 13.84,67.94 D1.VCC | 22.73,72.77 22.73,69.6 24.26,68.07 D2.VCC | 22.73,72.77 22.73,73.53 D2.CAP2 22.86,73.66 24.13,73.66 25.27,74.8 26.92,74.8 27.69,74.04 R2.2 27.81,73.91 28.57,74.68 29.97,74.68 | 29.97,74.68 32,74.68 33.02,73.66 D3.CAP2 33.15,73.53 33.15,70.87 34.67,69.34 34.67,68.07 D3.VCC | 29.97,74.68 29.97,79.76 31.11,80.9 31.11,83.82 U$145.5 | IC1.VCC 15.75,91.31 15.75,100.2 14.86,101.09 14.86,103 14.61,103.25 9.78,103.25 8.64,102.11 U$4.VCC | v21.72,72.77 22.73,72.77
  Bottom 0.381: U$4.VCC 8.64,101.98 8.64,95.89 10.79,93.73 U$123.P$2 10.92,93.6 12.7,91.82 12.7,84.07 15.11,81.66 15.11,78.11 U$126.P$4 15.24,77.85 19.11,73.98 | v21.72,72.77 20.32,72.77 19.11,73.98 | 19.11,73.98 7.87,62.74 U$1.PWR12
VCC1  (via drill 0.25)
  Top 0.381: D5.CAP2 58.55,73.66 60.07,73.66 61.21,74.8 62.74,74.8 63.63,73.91 R4.2 63.75,74.04 64.39,74.68 67.82,74.68 68.07,74.42 | 68.07,74.42 68.83,73.66 D6.CAP2 68.96,73.53 68.96,70.87 70.48,69.34 70.48,68.07 D6.VCC | D5.VCC 60.07,68.07 60.07,68.58 58.29,70.36 58.29,73.41 58.42,73.53 D5.CAP2 | 68.07,74.42 70.61,76.96 70.61,79.76 67.06,83.31 67.06,83.82 U$9.5 | U$10.PWR0 43.69,32.26 43.69,34.67 U$10.PWR1 43.69,34.8 43.69,37.08 U$10.PWR2 43.69,37.34 43.69,39.75 U$10.PWR3 43.69,39.88 43.69,42.16 U$10.PWR4 43.69,42.42 43.69,44.83 U$10.PWR5 43.69,44.96 43.69,47.24 U$10.PWR6 43.69,47.5 43.69,49.91 U$10.PWR7 43.69,50.04 43.69,52.32 U$10.PWR8 43.69,52.58 43.69,54.99 U$10.PWR9 43.69,55.12 43.69,57.4 U$10.PWR10 43.69,57.66 43.69,60.07 U$10.PWR11 43.69,60.2 43.69,62.48 U$10.PWR12 43.56,62.74 43.31,62.99 43.31,67.06 | IC2.VCC 51.69,91.31 51.69,100.2 50.8,101.09 50.8,102.87 50.42,103.25 45.59,103.25 44.45,102.11 U$13.VCC | 43.31,67.06 43.31,68.71 43.69,69.09 44.45,69.09 48.01,72.64 48.01,73.53 D4.CAP2 48.13,73.79 49.28,74.93 v49.28,75.56 | 43.31,67.06 45.59,67.06 46.48,67.94 49.66,67.94 D4.VCC | v55.12,83.57 58.42,80.26 58.42,73.79 D5.CAP2
  Bottom 0.381: U$13.VCC 44.45,101.98 46.61,99.82 46.61,93.73 U$6.P$2 46.61,93.47 46.61,85.85 44.58,83.82 44.58,63.63 43.69,62.74 U$10.PWR12 | v49.28,75.56 50.93,77.22 50.93,77.98 U$7.P$4 51.05,78.11 51.05,79.25 55.12,83.31 v55.12,83.57
VCC2  (via drill 0.25)
  Top 0.381: U$19.PWR0 79.5,32.26 79.5,34.67 U$19.PWR1 79.5,34.8 79.5,37.08 U$19.PWR2 79.5,37.34 79.5,39.75 U$19.PWR3 79.5,39.88 79.5,42.16 U$19.PWR4 79.5,42.42 79.5,44.83 U$19.PWR5 79.5,44.96 79.5,47.24 U$19.PWR6 79.5,47.5 79.5,49.91 U$19.PWR7 79.5,50.04 79.5,52.32 U$19.PWR8 79.5,52.58 79.5,54.99 U$19.PWR9 79.5,55.12 79.5,57.4 U$19.PWR10 79.5,57.66 79.5,60.07 U$19.PWR11 79.5,60.2 79.5,62.61 U$19.PWR12 79.5,62.74 85.09,68.33 D7.VCC 85.6,68.07 84.07,69.6 84.07,73.53 D7.CAP2 | D8.CAP2 94.49,73.66 95.89,73.66 97.03,74.8 98.68,74.8 99.57,73.91 R6.2 99.69,74.04 100.33,74.68 101.73,74.68 | 101.73,74.68 103.76,74.68 104.78,73.66 D9.CAP2 104.9,73.53 104.9,70.87 106.43,69.34 106.43,68.07 D9.VCC | D8.VCC 96.01,68.07 96.01,68.45 94.11,70.36 94.11,73.41 94.23,73.53 D8.CAP2 | 101.73,74.68 101.73,79.76 102.74,80.77 102.74,83.82 U$18.5 | IC3.VCC 87.5,91.31 87.5,100.2 86.61,101.09 86.61,102.87 86.23,103.25 81.53,103.25 80.39,102.11 U$22.VCC 80.39,101.85 80.39,100.71 82.55,98.55 82.55,93.73 U$15.P$2 | v91.31,83.95 94.36,80.9 94.36,73.79 D8.CAP2
  Bottom 0.381: 86.74,83.06 86.74,83.31 82.68,87.38 82.68,93.6 U$15.P$2 | 86.74,83.06 86.74,78.11 U$16.P$4 86.61,77.98 79.63,70.99 79.63,62.74 U$19.PWR12 | v91.31,83.95 89.03,83.95 88.14,83.06 86.74,83.06
VUSB
  Top 0.254: U$145.6 33.66,83.95 33.66,97.79 35.05,99.19 J1.VCC
VUSB1
  Top 0.254: U$9.6 69.6,83.95 69.6,97.92 70.87,99.19 J2.VCC
VUSB2
  Top 0.254: U$18.6 105.41,83.95 105.41,97.79 106.81,99.19 J3.VCC

## Text on the board
tPlace: .1uf | .1uf | .1uf | ATTINY PROTO / RUN NMC / 2018 | ATTINY PROTO / RUN NMC / 2018 | ATTINY PROTO / RUN NMC / 2018 | HELLO | HELLO | HELLO | POWER | POWER | POWER
bPlace: HOKANSON/BONTRAGER / BIT.LY/BADGECULTURE | HOKANSON/BONTRAGER / BIT.LY/BADGECULTURE | HOKANSON/BONTRAGER / BIT.LY/BADGECULTURE